# Altium PCB esp32s3lvgl.PcbDoc
Units mil, origin at the board's own origin, x right, y up, seen from the top; angles counter-clockwise.
Board outline 1865.95 x 1465 mil, 2 copper layers (Top Layer, Bottom Layer); 22 components, 41 nets, 153 pads, 214 vias.
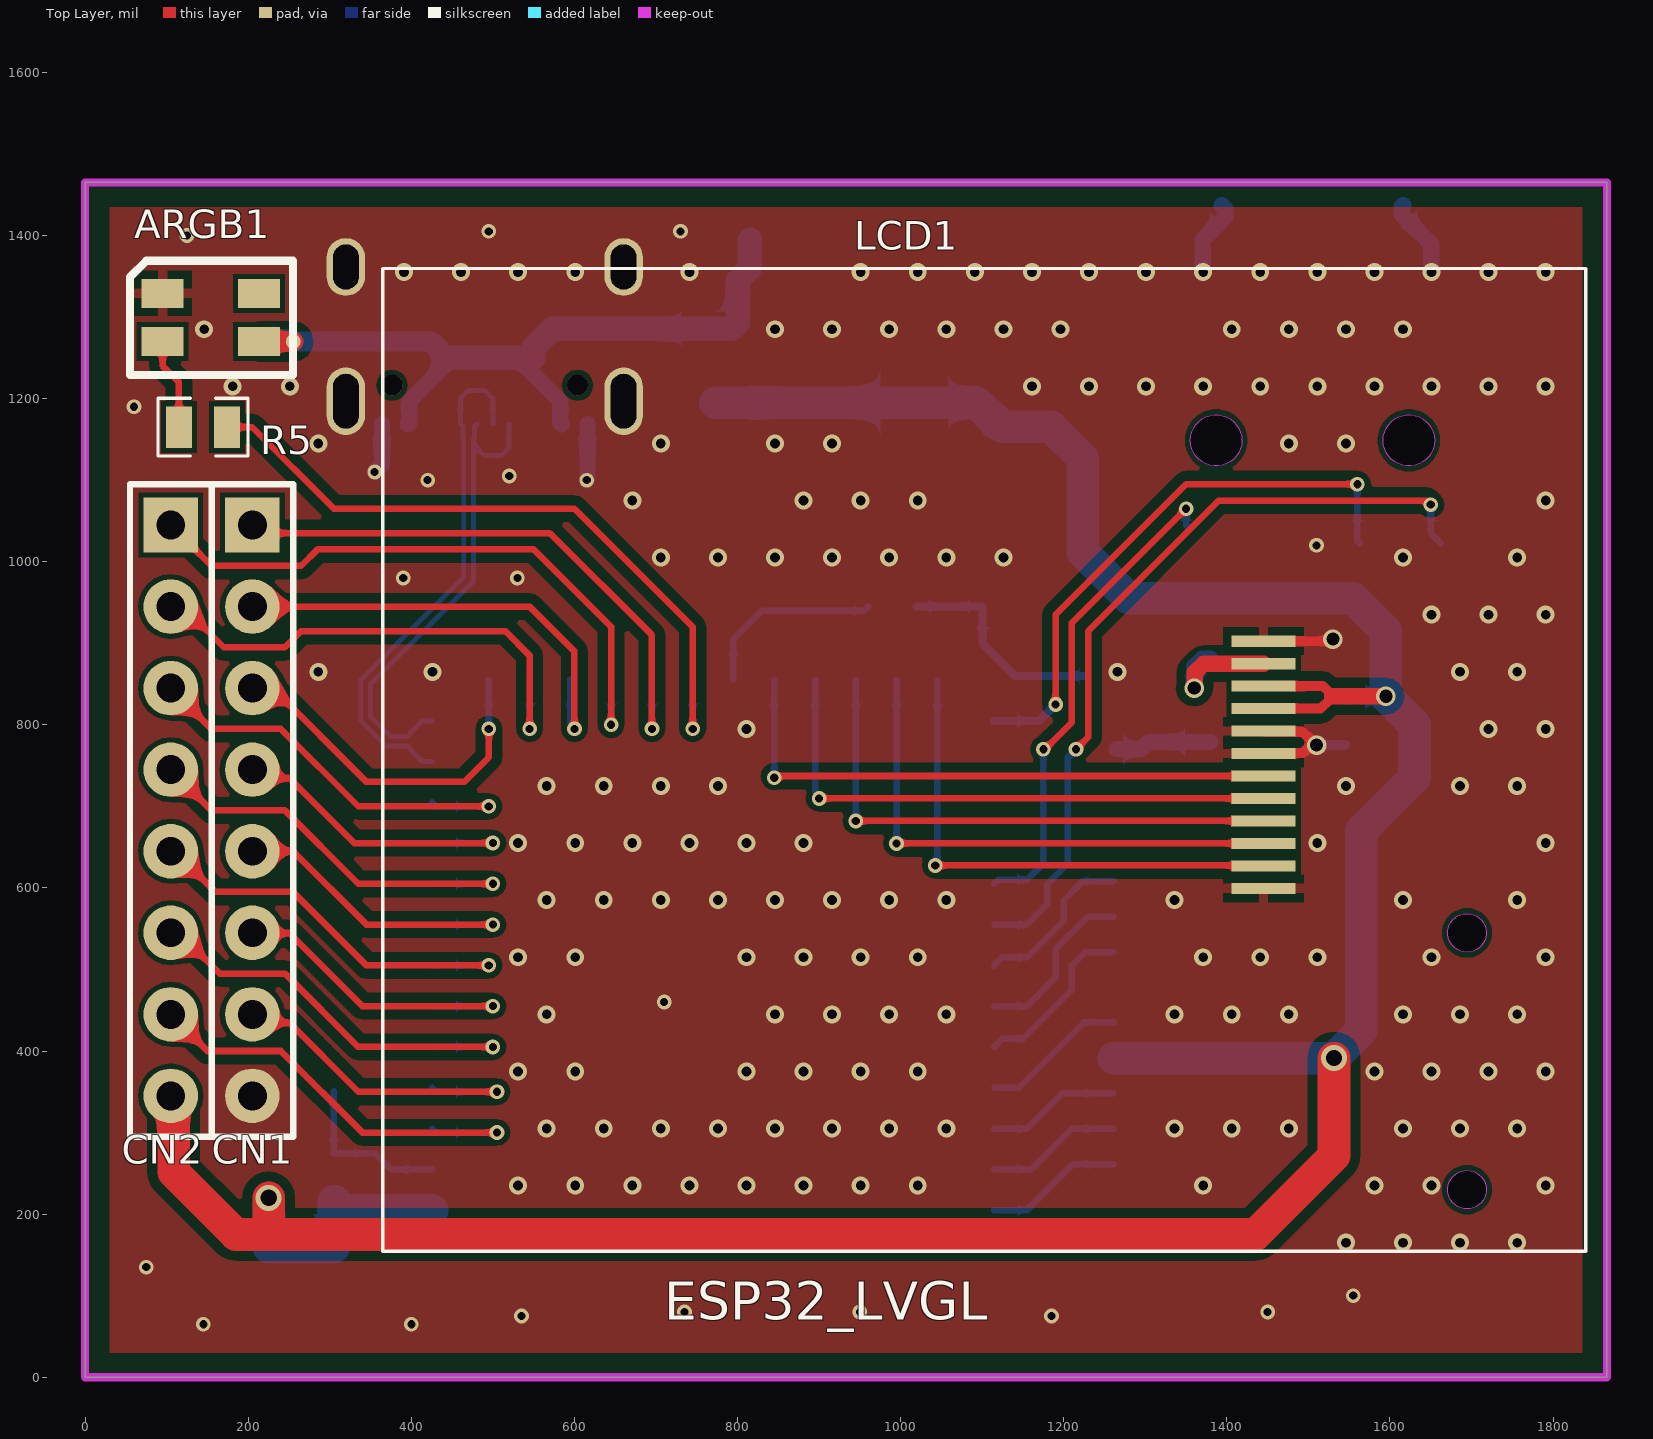
[diagram p0: Top Layer view]
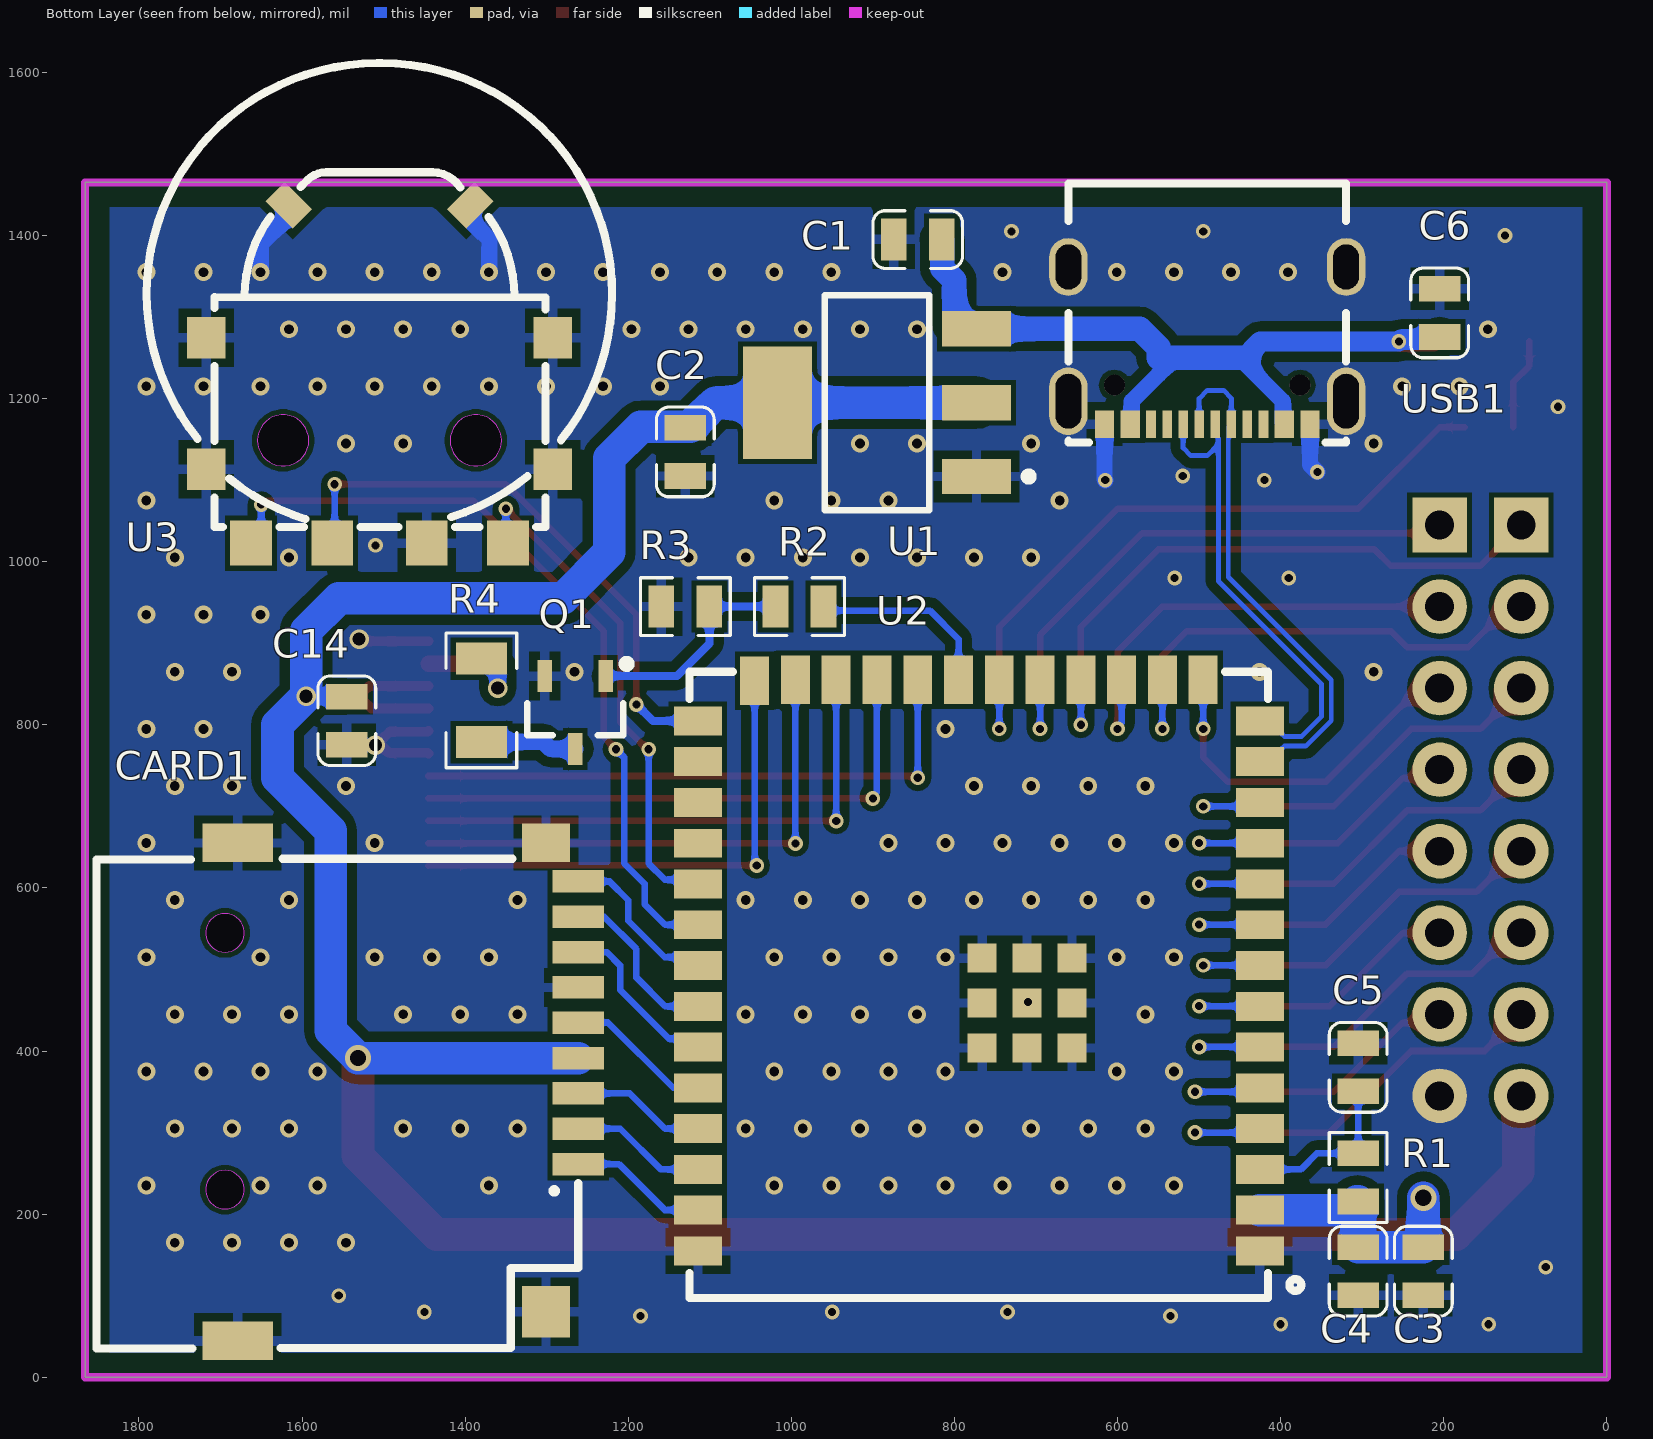
[diagram p1: Bottom Layer view, seen from below]

## Layer stack, top to bottom
Top Solder: solder mask 0.4, Solder Resist, Dk 3.5
Top Layer: signal copper 1.4
Dielectric 1: dielectric 12.6, FR-4, Dk 4.8
Bottom Layer: signal copper 1.4
Bottom Solder: solder mask 0.4, Solder Resist, Dk 3.5

## Board outline
0,0 0,1465 1865.94,1465 1865.94,0

## Design rules (kind name [scope] priority, off if disabled: settings)
Clearance Clearance_1 [OnLayer('Keep-Out Layer')] p1: gap=25 ignorepadtopadclearanceinfootprint=TRUE
Clearance [All] p2: gap=6 ignorepadtopadclearanceinfootprint=TRUE except(12: Track-Poly)
ComponentClearance [All] p1: gap=0 collisioncheckmode=3 verticalgap=10 showdistances=FALSE
DiffPairsRouting [All] p1: maxlimit=10 minlimit=6 mostfreqgap=10 toplayer_minwidth=6 toplayer_maxwidth=15 toplayer_prefwidth=15 bottomlayer_minwidth=6 bottomlayer_maxwidth=15 bottomlayer_prefwidth=15 maxuncoupledlength=500
HoleToHoleClearance [All] p1: gap=0 allowstackedmicrovias=TRUE
MinimumSolderMaskSliver [All] p1: minsoldermaskwidth=0
PolygonConnect [All] p1: thpad.connectstyle=Direct thpad.reliefconductorwidth=10 thpad.reliefentries=4 thpad.polygonreliefangle="90 Angle" thpad.airgapwidth=10 smdpad.connectstyle=Relief smdpad.reliefconductorwidth=12 smdpad.reliefentries=4 smdpad.polygonreliefangle="90 Angle" smdpad.airgapwidth=10 via.connectstyle=Direct via.reliefconductorwidth=10 via.reliefentries=4 via.polygonreliefangle="90 Angle" via.airgapwidth=10
RoutingVias [All] p1: holewidth=28 width=50 viastyle="Through Hole" minholewidth=8 minwidth=10 maxholewidth=28 maxwidth=50
SilkToSilkClearance [All] p1: silktosilkclearance=0
SilkToSolderMaskClearance [IsPad] p1: minsilkscreentomaskgap=0 clearancetoexposedcopper=TRUE
SolderMaskExpansion [All] p1: expansion=4
Width [All] p1: maxlimit=100 minlimit=8 preferedwidth=10
24 further rules are at their usual default settings.

## Classes and differential pairs
differential pair USB: +USB_P -USB_N

## Components (designator, comment, footprint, x,y, rotation, side; value= is the part's Value field where it differs from the comment)
ARGB1 "WS2812_3535" 3535_WS2812 95,1329.06 r0 top
C1 "1uF/50V/0805" C0805 845,1395 r180 bottom
C2 "1uF/50V/0805" C0805 1130,1134.53 r90 bottom
C3 "10uF/25V/0805" C0805 225,130 r270 bottom
C4 "0.1uF/50V/0805" C0805 305,130 r270 bottom
C5 "0.1uF/50V/0805" C0805 305,380 r270 bottom
C6 "10uF" C0805 205,1305 r90 bottom
C14 "10uF/25V/0805" C0805 1545,805 r90 bottom
CARD1 "TF PUSH" TF-SMD_TF-PUSH 1470,350 r270 bottom locked
CN1 "Header 8" HDR2.54-LI-8P 205,695 r270 top
CN2 "Header 8" HDR2.54-LI-8P 105,695 r270 top
LCD1 "LCD_LCD" LCD_1.6_IPS 540,1284.41 r0 top locked
Q1 "S8050" SOT23-3L 1265,815 r90 bottom
R1 "10K/0805" R0805 305,245 r90 bottom
R2 "1K/0805" R0805 990,945 r180 bottom
R3 "10K/0805" R0805 1130,945 r180 bottom
R4 "10Ω" R1206 1380,830 r90 bottom
R5 "1kΩ" R0805 144.53,1165 r180 top
U1 "IC_117-3.3V" SOT-223 895,1195 r180 bottom
U2 "MODU_ESP32_S3_1U" EPS32-S3_1U 770,505 r0 bottom
U3 "SIQ-02FVS3" SW-SMD_SIQ-02FVS3_1 1505,1230 r180 bottom locked
USB1 "USB_TYPE_C" USB-type_C 490,1265 r0 bottom locked

## Footprints (in the part's own frame and the unit in brackets; to place one, negate y for a bottom-side part, rotate by r counter-clockwise, add the part's x,y. Pads: shape width x height; smd on the part's side, far side on the other; paste and mask are expansions set on the pad)
3535_WS2812 [mm]
  rect 1.3x0.9 smd: 1(0,0) 2(0,-1.5) 3(3,-1.5) 4(3,0)
  silkscreen extent -1.02,-2.54 4.06,1.02
C0805 [mm] "C0805"
  rect 0.8x1.3 smd: 1(-0.75,0) 2(0.75,0)
  silkscreen extent -1.4,-0.9 1.4,0.9
EPS32-S3_1U [mm]
  rect 1.5x0.9 smd: 1(-8.75,8.895) 2(-8.75,7.625) 3(-8.75,6.355) 4(-8.75,5.085) 5(-8.75,3.815) 6(-8.75,2.545) 7(-8.75,1.275) 8(-8.75,0.005) 9(-8.75,-1.265) 10(-8.75,-2.535) 11(-8.75,-3.805) 12(-8.75,-5.075) 13(-8.75,-6.345) 14(-8.75,-7.615) 27(8.75,-7.615) 28(8.75,-6.345) 29(8.75,-5.075) 30(8.75,-3.805) 31(8.75,-2.535) 32(8.75,-1.265) 33(8.75,0.005) 34(8.75,1.275) 35(8.75,2.545) 36(8.75,3.815) 37(8.75,5.085) 38(8.75,6.355) 39(8.75,7.625) 40(8.75,8.895)
  rect 0.9x1.5 smd: 15(-6.985,-8.895) 16(-5.715,-8.895) 17(-4.445,-8.895) 18(-3.175,-8.895) 19(-1.905,-8.895) 20(-0.635,-8.895) 21(0.635,-8.895) 22(1.905,-8.895) 23(3.175,-8.895) 24(4.445,-8.895) 25(5.715,-8.895) 26(6.985,-8.865)
  rect 0.9x0.9 smd: 41(-2.9,-0.225) 41(-2.9,1.175) 41(-2.9,2.575) 41(-1.501,-0.225) 41(-1.501,1.175) 41(-1.501,2.575) 41(-0.1,-0.225) 41(-0.1,1.175) 41(-0.1,2.575)
  silkscreen extent -10.04,-9.14 9.02,10.36
HDR2.54-LI-8P [mm] "排针，8脚"
  rect 1.7x1.7 hole 0.9: 1(-8.89,0)
  round 1.7 hole 0.9: 2(-6.35,0) 3(-3.81,0) 4(-1.27,0) 5(1.27,0) 6(3.81,0) 7(6.35,0) 8(8.89,0)
  silkscreen extent -10.16,-1.27 10.16,1.27, body extent -10.16,-1.27 10.16,1.27, height 8.5
LCD_1.6_IPS [mm]
  rect 2x0.35 smd: 1(22.987,-9.699) 2(22.987,-10.399) 3(22.987,-11.099) 4(22.987,-11.799) 5(22.987,-12.499) 6(22.987,-13.199) 7(22.987,-13.899) 8(22.987,-14.599) 9(22.987,-15.299) 10(22.987,-15.999) 11(22.987,-16.699) 12(22.987,-17.399)
  silkscreen extent -4.44,-28.7 33.02,1.91, body extent -4.66,-28.36 33.02,1.69, height 1.62
R0805 [mm] "R0805"
  rect 0.8x1.3 smd: 1(-0.75,0) 2(0.75,0)
  silkscreen extent -1.4,-0.9 1.4,0.9
R1206 [mm] "R1206"
  rect 1x1.6 smd: 1(1.299,0) 2(-1.299,0)
  silkscreen extent -2.1,-1.1 2.1,1.1
SOT23-3L [mm] "3x1.3x1mm(长宽高)"
  rect 1x0.45 smd: 1(1.134,-0.95) 2(1.134,0.95) 3(-1.134,0)
  silkscreen extent -0.71,-1.72 1.64,1.5, body extent -1.21,-1.5 1.19,1.5, height 1.05
SOT-223 [mm] "SOT-223/SC-73; 4 Leads; Body 6.7 x 7.3 mm, inc. leads (LxW max)"
  rect 2.15x1.1 smd: 1(3.1,-2.3) 2(3.1,0) 3(3.1,2.3)
  rect 2.15x3.5 smd: 4(-3.1,0)
  silkscreen extent -1.62,-3.35 4.85,3.35, body extent -3.38,-3.25 3.58,3.25, height 1.65
SW-SMD_SIQ-02FVS3_1 [mm]
  rect 1.2x1.3 smd paste+0 mask+0.05: 1(5.4,-2.964) 2(5.4,1.136) 5(-5.4,1.136) 6(-5.4,-2.964)
  rect 0.85x1.2 smd rot 135 paste+0 mask+0.05: 3(2.828,5.264)
  rect 0.85x1.2 smd rot 45 paste+0 mask+0.05: 4(-2.828,5.264)
  rect 1.3x1.4 smd paste+0 mask+0.05: A(-4,-5.264) B(4,-5.264) C(1.475,-5.264) S(-1.475,-5.264)
  Keep-Out Layer board cut-out: 3.8,-2.064 3.721,-1.717 3.499,-1.439 3.178,-1.284 2.822,-1.284 2.501,-1.439 2.279,-1.717 2.2,-2.064 2.2,-2.064 2.279,-2.411 2.501,-2.69 2.822,-2.844 3.178,-2.844 3.499,-2.69 3.721,-2.411 3.8,-2.064
  Keep-Out Layer board cut-out: -2.2,-2.064 -2.279,-1.717 -2.501,-1.439 -2.822,-1.284 -3.178,-1.284 -3.499,-1.439 -3.721,-1.717 -3.8,-2.064 -3.8,-2.064 -3.721,-2.411 -3.499,-2.69 -3.178,-2.844 -2.822,-2.844 -2.501,-2.69 -2.279,-2.411 -2.2,-2.064
  silkscreen extent -7.25,-4.76 7.25,9.69
TF-SMD_TF-PUSH [mm]
  rect 0.7x1.6 smd paste+0 mask+0.051: 1(2.25,5.3) 2(1.15,5.3) 3(0.05,5.3) 4(-1.05,5.3) 5(-2.15,5.3) 6(-3.25,5.3) 7(-4.35,5.3) 8(-5.45,5.3) CD(-6.55,5.3)
  rect 1.2x1.5 smd paste+0 mask+0.051: 10(-7.75,4.3)
  rect 1.2x2.2 smd paste+0 mask+0.051: 11(-7.75,-5.3) 12(7.75,-5.3)
  rect 1.6x1.5 smd paste+0 mask+0.051: 13(6.85,4.3)
  Keep-Out Layer board cut-out: -4.35,-5.7 -4.409,-5.44 -4.576,-5.231 -4.816,-5.115 -5.083,-5.115 -5.324,-5.231 -5.491,-5.44 -5.55,-5.7 -5.55,-5.7 -5.491,-5.96 -5.324,-6.169 -5.083,-6.285 -4.816,-6.285 -4.576,-6.169 -4.409,-5.96 -4.35,-5.7
  Keep-Out Layer board cut-out: 3.65,-5.7 3.591,-5.44 3.424,-5.231 3.184,-5.115 2.917,-5.115 2.676,-5.231 2.509,-5.44 2.45,-5.7 2.45,-5.7 2.509,-5.96 2.676,-6.169 2.917,-6.285 3.184,-6.285 3.424,-6.169 3.591,-5.96 3.65,-5.7
  silkscreen extent -7.26,-9.7 8,5.3
USB-type_C [mm]
  oval 1.2x2.1 hole 0.8 slot 1.7 at 90 deg: 1(-4.325,1.732) 1(4.325,1.732)
  oval 1.2x1.8 hole 0.8 slot 1.4 at 90 deg: 1(-4.325,-2.448) 1(4.325,-2.448)
  rect 0.6x0.85 smd: A1B12(-3.2,2.447) A4B9(-2.4,2.447) B1A12(3.2,2.448) B4A9(2.4,2.448)
  rect 0.3x0.85 smd: A5(-1.25,2.447) A6(-0.25,2.447) A7(0.25,2.447) A8(1.25,2.447) B5(1.75,2.447) B6(0.75,2.447) B7(-0.75,2.447) B8(-1.75,2.447)
  round 0.65 hole 0.65 unplated: ""(-2.89,1.232) ""(2.89,1.232)
  silkscreen extent -4.32,-5.05 4.32,3.01

## Part data
ARGB1: "ARGB 3535 灯珠"
C1 C2: library part C0805_1uF_20%_50V, "片状电容 0805 1uF 20% 50V", 单价=0.0298, 编码=C27981
C3 C14: library part C0805_10uF_20%_25V, "片状电容 0805 10uF 20% 25V"
  C3: 单价=0.0393, 编码=C29224
  C14: 单价=0.05, 编码=C158
C4 C5: library part C0805_0.1uF_20%_50V, "片状电容 0805 0.1uF 20% 50V", 单价=0.0186, 编码=C17
C6: library part C0805_10uF
CARD1: JLCPCB Part Class="Extended Part", LCSC Part Name=自弹式TF卡座, Manufacturer="SHOU HAN(首º", Operating Temperature Range=-20℃~+90?, Add into BOM=yes, Card Connection Mode=×Ôµ, Card Type=MicroSD¿¨(TF¿, Connector Type=卡?, Convert to PCB=yes, Datasheet=https://atta.szlcsc.com/upload/public/pdf/source/20191011/C393941_0DDD896EE907FEB750D8B7B8982E2A67.pdf, Device="TF PUSH", Manufacturer Part="TF PUSH", Maximum Body Height=2mm, Name="TF PUSH", Supplier=LCSC, Supplier Footprint=SMD, Supplier Part=C393941, Symbol="TF PUSH"
CN1 CN2: library part HDR_8P_2.54, "2.54x8P 单排连接器"
LCD1: library part LCD_1.6_240*280, "1.6寸isp显示屏，spi口"
Q1: library part BJT-NPN-8050, "NPN 三极管 8050  Ic：1.5A Vce=25 额定功率300mW", 单价=0.05438, 编码=C44472
R1 R3: library part R0805_10K_1%_0.125W, "片状电阻 0805 10KΩ±1% 0.125W", 单价=0.0122, 编码=C174
R2: library part R0805_1K_1%_0.125W, "片状电阻 0805 1K±1% 0.125W", 单价=0.009, 编码=C175
R4: library part R1206_10Ω
R5: library part R0805_1kΩ
U1: library part IC_1117B-3.3V, "线性稳压IC 3.3V 最大输入电压 15V 压降1.2V@800mA", 单价=0.3178, 编码=C3472
U2: BOM_JLCPCB Part Class="Extended Part", BOM_Manufacturer="ESPRESSIF 乐?", BOM_Manufacturer Part=ESP32-S3-WROOM-1U-N8R8, BOM_Supplier=LCSC, BOM_Supplier Part=C2980300, Contributor=LCSC, link=https://atta.szlcsc.comnull, spicePre=U, spiceSymbolName=ESP32-S3-WROOM-1U-N8R8
U3: JLCPCB Part Class="Extended Part", LCSC Part Name=拨轮滚Â, =MITSUMI(美上, Add into BOM=yes, Convert to PCB=yes, Datasheet=https://atta.szlcsc.com/upload/public/pdf/source/20220728/2FBC1A98A06DC86460FC69DAE20456FC.pdf, Device=SIQ-02FVS3, Name=#NAME?, Supplier=LCSC, Supplier Part=C2925423, Symbol=SIQ-02FVS3
USB1: library part CON_USB_TYPE_C, BOM_JLCPCB Part Class="Extended Part", BOM_Manufacturer=韩国, BOM_Manufacturer Part=TYPE-C-31-M-09, BOM_Supplier=LCSC, BOM_Supplier Part=C2689967, Contributor=LCSC, spicePre=U, spiceSymbolName=TYPE-C-31-M-09

## Via types
v1: diameter 22, hole 12, Top Layer to Bottom Layer, 160 vias
v2: diameter 18, hole 10, Top Layer to Bottom Layer, tented both sides, 48 vias
v3: diameter 24, hole 16, Top Layer to Bottom Layer, tented both sides, 4 vias
v4: diameter 32, hole 20, Top Layer to Bottom Layer, tented both sides, 2 vias

## Nets (pads, with @x,y where several pads share a name; then routed paths per layer and width w, separated by ;. In a path a pad name is that pad's centre, name@x,y a point inside that pad or via, vN(x,y) a via of type N, cw(c..) or ccw(c..) an arc to the next point about the centre after c; other vN are vias at no path point)
GND: ARGB1.1 C1.1 C2.1 C3.2 C4.2 C5.1 C6.2 C14.1 CARD1.6 CARD1.10 CARD1.11 CARD1.12 CARD1.13 CN1.8 LCD1.1 LCD1.5 LCD1.6 LCD1.12 Q1.2 R3.1 U1.1 U2.1 U2.40 U2.41 U3.1 U3.2 U3.3 U3.4 U3.5 U3.6 U3.C USB1.1 USB1.A1B12 USB1.B1A12 | length 577.3
  Top Layer w12: LCD1.6 1445.89,765.65 1493.86,765.65 v3@1500,771.79 ; LCD1.5 1445.89,791.43 1492.97,791.43 1509.4,775 v3(1510,775) ; LCD1.1 1522.56,902.56 1522.7,902.7 1527.7,902.7 v3(1530,905)
  Bottom Layer w12: v3(1510,775) 1510.24,775.24 1544.76,775.24 C14.1
  Bottom Layer w20: v2(355,1110) 364.01,1119.01 USB1.A1B12 ; v2(615,1100) 615.99,1100.99 USB1.B1A12 ; v1(1370.94,1355) 1370.56,1355.38 1370.56,1384.44 1370,1385 1370,1394.81 1398.28,1423.09 1398.28,1432.62 U3.3 ; U3.4 1614.31,1435.21 1614.31,1425.69 1650.56,1389.44 1650.56,1355.38 v1(1650.94,1355)
  other v1: 1545.94,165 1615.94,165 1685.94,165 1755.94,165 530.94,235 600.94,235 670.94,235 740.94,235 810.94,235 880.94,235 950.94,235 1020.94,235 1370.94,235 1580.94,235 1650.94,235 1790.94,235 565.94,305 635.94,305 705.94,305 775.94,305 845.94,305 915.94,305 985.94,305 1055.94,305 1335.94,305 1405.94,305 1475.94,305 1615.94,305 1685.94,305 1755.94,305 530.94,375 600.94,375 810.94,375 880.94,375 950.94,375 1020.94,375 1580.94,375 1650.94,375 1720.94,375 1790.94,375 565.94,445 845.94,445 915.94,445 985.94,445 1055.94,445 1335.94,445 1405.94,445 1475.94,445 1615.94,445 1685.94,445 1755.94,445 530.94,515 600.94,515 810.94,515 880.94,515 950.94,515 1020.94,515 1370.94,515 1440.94,515 1510.94,515 1650.94,515 1790.94,515 565.94,585 635.94,585 705.94,585 775.94,585 845.94,585 915.94,585 985.94,585 1055.94,585 1335.94,585 1615.94,585 1755.94,585 530.94,655 600.94,655 670.94,655 740.94,655 810.94,655 880.94,655 1510.94,655 1790.94,655 565.94,725 635.94,725 705.94,725 775.94,725 1545.94,725 1685.94,725 1755.94,725 810.94,795 1720.94,795 1790.94,795 285.94,865 425.94,865 1265.94,865 1685.94,865 1755.94,865 1650.94,935 1720.94,935 1790.94,935 705.94,1005 775.94,1005 845.94,1005 915.94,1005 985.94,1005 1055.94,1005 1125.94,1005 1615.94,1005 1755.94,1005 670.94,1075 880.94,1075 950.94,1075 1020.94,1075 1790.94,1075 285.94,1145 705.94,1145 845.94,1145 915.94,1145 1475.94,1145 1545.94,1145 180.94,1215 250.94,1215 1160.94,1215 1230.94,1215 1300.94,1215 1370.94,1215 1440.94,1215 1510.94,1215 1580.94,1215 1650.94,1215 1720.94,1215 1790.94,1215 145.94,1285 845.94,1285 915.94,1285 985.94,1285 1055.94,1285 1125.94,1285 1195.94,1285 1405.94,1285 1475.94,1285 1545.94,1285 1615.94,1285 390.94,1355 460.94,1355 530.94,1355 600.94,1355 740.94,1355 950.94,1355 1020.94,1355 1090.94,1355 1160.94,1355 1230.94,1355 1300.94,1355 1440.94,1355 1510.94,1355 1580.94,1355 1720.94,1355 1790.94,1355
  other v2: 145,65 400,65 535,75 1185,75 735,80 950,80 1450,80 1555,100 75,135 710,460 390,980 530,980 1510,1020 420,1100 520,1105 60,1190 125,1400 495,1405 730,1405
IO_1: CN2.7 U2.4 | length 541.5
  Top Layer w8: CN2.7 150,400 240,400 340,300 v2(505,300)
  Bottom Layer w8: U2.4 430.32,300 v2(505,300)
IO_2: CN1.7 U2.5 | length 420.8
  Top Layer w8: CN1.7 215.46,434.54 250.46,434.54 335,350 v2(505,350)
  Bottom Layer w8: U2.5 430.32,350 v2(505,350)
IO_3: CN2.6 U2.6 | length 527.6
  Top Layer w8: CN2.6 115,545 165,495 245,495 335,405 v2(500,405)
  Bottom Layer w8: U2.6 425.71,405 v2(500,405)
IO_4: CN1.6 U2.7 | length 406.8
  Top Layer w8: CN1.6 205.46,544.54 250.46,544.54 340,455 v2(500,455)
  Bottom Layer w8: U2.7 425.71,455 v2(500,455)
IO_5: CN2.5 U2.8 | length 517.6
  Top Layer w8: CN2.5 110,645 160,595 255,595 345,505 v2(495,505)
  Bottom Layer w8: U2.8 425.71,505 v2(495,505)
IO_6: CN1.5 U2.9 | length 406.8
  Top Layer w8: CN1.5 255,645 345,555 v2(500,555)
  Bottom Layer w8: U2.9 425.71,555 v2(500,555)
IO_7: CN2.4 U2.10 | length 527.6
  Top Layer w8: CN2.4 155,695 245,695 335,605 v2(500,605)
  Bottom Layer w8: U2.10 425.71,605 v2(500,605)
IO_8: CN1.4 U2.11 | length 406.8
  Top Layer w8: CN1.4 215.46,734.54 250.46,734.54 330,655 v2(500,655)
  Bottom Layer w8: U2.11 425.71,655 v2(500,655)
IO_9: CN2.3 U2.12 | length 521.5
  Top Layer w8: CN2.3 155,795 240,795 335,700 v2(495,700)
  Bottom Layer w8: U2.12 430.32,700 v2(495,700)
IO_10: CN1.3 U2.15 | length 430.3
  Top Layer w8: CN1.3@220,845 230,845 345,730 465,730 495,760 v2(495,795)
  Bottom Layer w8: v2(495,795) U2.15
IO_11: CN2.2 U2.16 | length 631.6
  Top Layer w8: CN2.2 120,945 170,895 245,895 265,915 515,915 545,885 v2(545,795)
  Bottom Layer w8: v2(545,795) U2.16
IO_12: CN1.2 U2.17 | length 575.1
  Top Layer w8: CN1.2 545,945 600,890 v2(600,795)
  Bottom Layer w8: U2.17 595,802.71 600,797.71 v2(600,795)
IO_13: CN2.1 U2.18 | length 783.5
  Top Layer w8: CN2.1 155,995 265,995 285,1015 550,1015 645,920 v2(645,800)
  Bottom Layer w8: v2(645,800) U2.18
IO_14: CN1.1 U2.19 | length 721.1
  Top Layer w8: CN1.1 215,1035 570,1035 695,910 v2(695,795)
  Bottom Layer w8: v2(695,795) U2.19
KEY_6: U2.32 U3.A | length 972.4
  Top Layer w8: v2(1215,770) 1230,785 1230,915 1390,1075 1645,1075 v2(1650,1070)
  Bottom Layer w8: U2.32 1154.8,554.8 1180,580 1180,605 1205,630 1205,760 v2(1215,770) ; v2(1650,1070) 1650,1035.23 U3.A
KEY_7: U2.27 U3.S | length 703.7
  Top Layer w8: v2(1190,825) 1190,935 1350,1095 v2(1560,1095)
  Bottom Layer w8: v2(1560,1095) 1560,1025.82 U3.S
  Bottom Layer w10: U2.27 1169.8,804.8 v2(1190,825)
KEY_8: U2.31 U3.B | length 603
  Top Layer w8: v2(1175,770) 1176.87,770 1210,803.13 1210,925 v2(1350,1065)
  Bottom Layer w8: U2.31 1119.68,610 1155,610 1175,630 v2(1175,770) ; v2(1350,1065) 1350,1045 U3.B@1352.44,1042.56
LCD_BG: R2.2 U2.21 | length 231.8
  Bottom Layer w8: U2.21 795,905 830,940 955.47,940 R2.2
LCD_CLK: LCD1.9 U2.24 | length 673.1
  Top Layer w8: v2(945,682.09) LCD1.9
  Bottom Layer w8: v2(945,682.09) U2.24
LCD_CS: LCD1.8 U2.23 | length 692.6
  Top Layer w8: v2(900,709.65) LCD1.8
  Bottom Layer w8: U2.23 895,717.35 900,712.35 v2(900,709.65)
LCD_DC: LCD1.7 U2.22 | length 720.2
  Top Layer w8: v2@845,737.2 LCD1.7
  Bottom Layer w8: v2(845,735) U2.22
LCD_RST: LCD1.11 U2.26 | length 630.3
  Top Layer w8: v2(1042.5,627.5) 1444.47,627.5 LCD1.11
  Bottom Layer w8: v2(1042.5,627.5) 1045,630 U2.26
LCD_SDA: LCD1.10 U2.25 | length 650.7
  Top Layer w8: v2(995,654.53) LCD1.10
  Bottom Layer w8: v2(995,654.53) U2.25
NetARGB1_2: ARGB1.2 R5.2 | length 113.3
  Top Layer w8: ARGB1.2 95,1240 115,1220 R5.2
NetC5_2: C5.2 R1.2 U2.3 | length 204.6
  Bottom Layer w8: C5.2 R1.2 355.47,274.53 375.2,254.8 U2.3
NetLCD1_2: LCD1.2 R4.1 | length 158.6
  Top Layer w20: v3(1360,845) 1360.77,845.77 1360.77,864.05 1371.72,875 LCD1.2
  Bottom Layer w20: v3(1360,845) 1360,871.48 1369.69,881.16 R4.1
NetQ1_1: Q1.1 R2.1 R3.2 | length 270.1
  Bottom Layer w10: R2.1 R3.2 1100.47,899.53 1140,860 1227.24,860 Q1.1
NetQ1_3: Q1.3 R4.2 | length 118.5
  Bottom Layer w20: Q1.3 1295.35,770.35 1303.84,778.84 R4.2
SD_CD: CARD1.CD U2.33 | length 204.4
  Bottom Layer w8: U2.33 1124.68,515 1155.31,515 1200,559.69 1200,585 1222.87,607.87 CARD1.CD
SD_CLK: CARD1.5 U2.36 | length 180.2
  Bottom Layer w8: U2.36 1144.8,354.8 1225,435 1260.98,435 CARD1.5
SD_CMD: CARD1.3 U2.37 | length 164.8
  Bottom Layer w8: U2.37 1154.8,304.8 1198.03,348.03 CARD1.3
SD_D0: CARD1.7 U2.35 | length 212.7
  Bottom Layer w8: U2.35 1124.68,415 1150,415 1210,475 1210,505 1226.26,521.26 CARD1.7
SD_D1: CARD1.8 U2.34 | length 212.8
  Bottom Layer w8: U2.34 1154.8,454.8 1190,490 1190,525 1229.56,564.56 CARD1.8
SD_D2: CARD1.1 U2.39 | length 170.3
  Bottom Layer w8: U2.39 1114.68,205 1155,205 1211.41,261.41 CARD1.1
SD_D3: CARD1.2 U2.38 | length 167.5
  Bottom Layer w8: U2.38 1159.8,254.8 1209.72,304.72 CARD1.2
USB_N: U2.13 USB1.A7 USB1.B7 | length 637.2
  Bottom Layer w6: U2.13 413.7,754.8 398.98,769.52 398.98,770.29 395.47,773.8 369.22,773.8 338,805.03 338,854.97 464.32,981.29 464.32,1151.4 463.38,1152.34 463.38,1165.74 USB1.B7 460.47,1200.47 470,1210 490,1210 500,1200 500,1168.81 USB1.A7
USB_P: U2.14 USB1.A6 USB1.B6 | length 588.4
  Bottom Layer w6: U2.14 413.7,804.8 398.98,790.09 398.98,789.32 395.47,785.8 374.2,785.8 350,810 350,850 476.32,976.32 476.32,1143.68 ; USB1.A6 477.25,1165.74 477.25,1152.34 476.32,1151.4 476.32,1143.68 ; USB1.B6 519.53,1139.53 510,1130 490,1130 476.32,1143.68
VCC_3.3V: C2.2 C3.1 C4.1 C14.2 CARD1.4 CN2.8 LCD1.3 LCD1.4 R1.1 U1.2 U1.4 U2.2 | length 4230.7
  Top Layer w12: LCD1.4 1514.88,819.88 1525,830 1525,840 1517.56,847.44 LCD1.3
  Top Layer w20: 1530,835 v3(1595,835)
  Top Layer w40: CN2.8 108.46,341.54 108.46,251.54 185,175 220,175 ; v4(225,220) 225,180 220,175 ; v4(1531.34,391.34) 1531.34,271.34 1435,175 220,175
  Bottom Layer w20: C14.2 1545.24,834.76 1594.76,834.76 v3(1595,835)
  Bottom Layer w40: v4(225,220) C3.1 C3.1@225.75,159.53 ; C3.1@230,163.78 C3.1@225.75,159.53 ; U2.2 317.01,204.8 306.34,215.47 R1.1 C4.1 C3.1@225.75,159.53 ; U1.2 1093.19,1195 1118.66,1169.53 1120,1169.53 1124.25,1165.28 1184.72,1165.28 1223.44,1126.56 1223.44,1011.56 1280,955 1555,955 1595,915 v3(1595,835) 1630,800 1630,735 1565,670 1565,425 v4(1531.34,391.34) CARD1.4
VCC_5V: ARGB1.3 C1.2 C6.1 U1.3 USB1.A4B9 USB1.B4A9 | length 988
  Top Layer w25: ARGB1.3 v2(255,1270)
  Bottom Layer w20: USB1.A4B9 397.33,1170.48 397.33,1196.87 447.73,1247.27 450.46,1250 ; 530,1250 549.55,1230.45 549.55,1230 582.68,1196.87 582.68,1170.44 USB1.B4A9
  Bottom Layer w25: C6.1 208.25,1272.22 252.78,1272.22 v2(255,1270) 425,1270 447.73,1247.27
  Bottom Layer w30: 450.46,1250 530,1250 549.55,1250 549.55,1262.43 572.68,1285.55 U1.3 793.62,1285.55 800.28,1292.2 800.28,1345.28 814.72,1359.72 814.72,1394.25 C1.2
WS2812_DIN: R5.1 U2.20 | length 857.6
  Top Layer w8: R5.1 205,1165 305,1065 600,1065 745,920 v2(745,795)
  Bottom Layer w8: v2(745,795) U2.20
pads on no net: ARGB1.4 U2.28 U2.29 U2.30 USB1. USB1.A5 USB1.A8 USB1.B5 USB1.B8

## Polygon pours and split planes (outlines as drawn)
GND on Top Layer "Top Layer-GND" (solid, remove dead copper, pour order 0): 0,0 0,1465 1865.94,1465 1865.94,0
GND on Bottom Layer "Bottom Layer-GND" (solid, remove dead copper, pour order 2): 0,0 0,1465 1865.94,1465 1865.94,0

## Keep-outs
Keep-Out Layer:
  the board outline again, w10

## Silkscreen, mask and mechanical layers (free items; w line width, h text height)
Top Overlay:
  text "ESP32_LVGL" at 710,55 h80
Mechanical 1:
  the board outline again, w10